# Altium PCB 2002_B_CapteurMeteoWifi.PcbDoc
Units mm, origin at the board's own origin, x right, y up, seen from the top; angles counter-clockwise.
Board outline 88 x 88 mm, 2 copper layers (Top Layer, Bottom Layer), stack 1.586 mm thick; 36 components, 34 nets, 190 pads, 117 vias.
Unrouted connection lines stored in the file: 3.
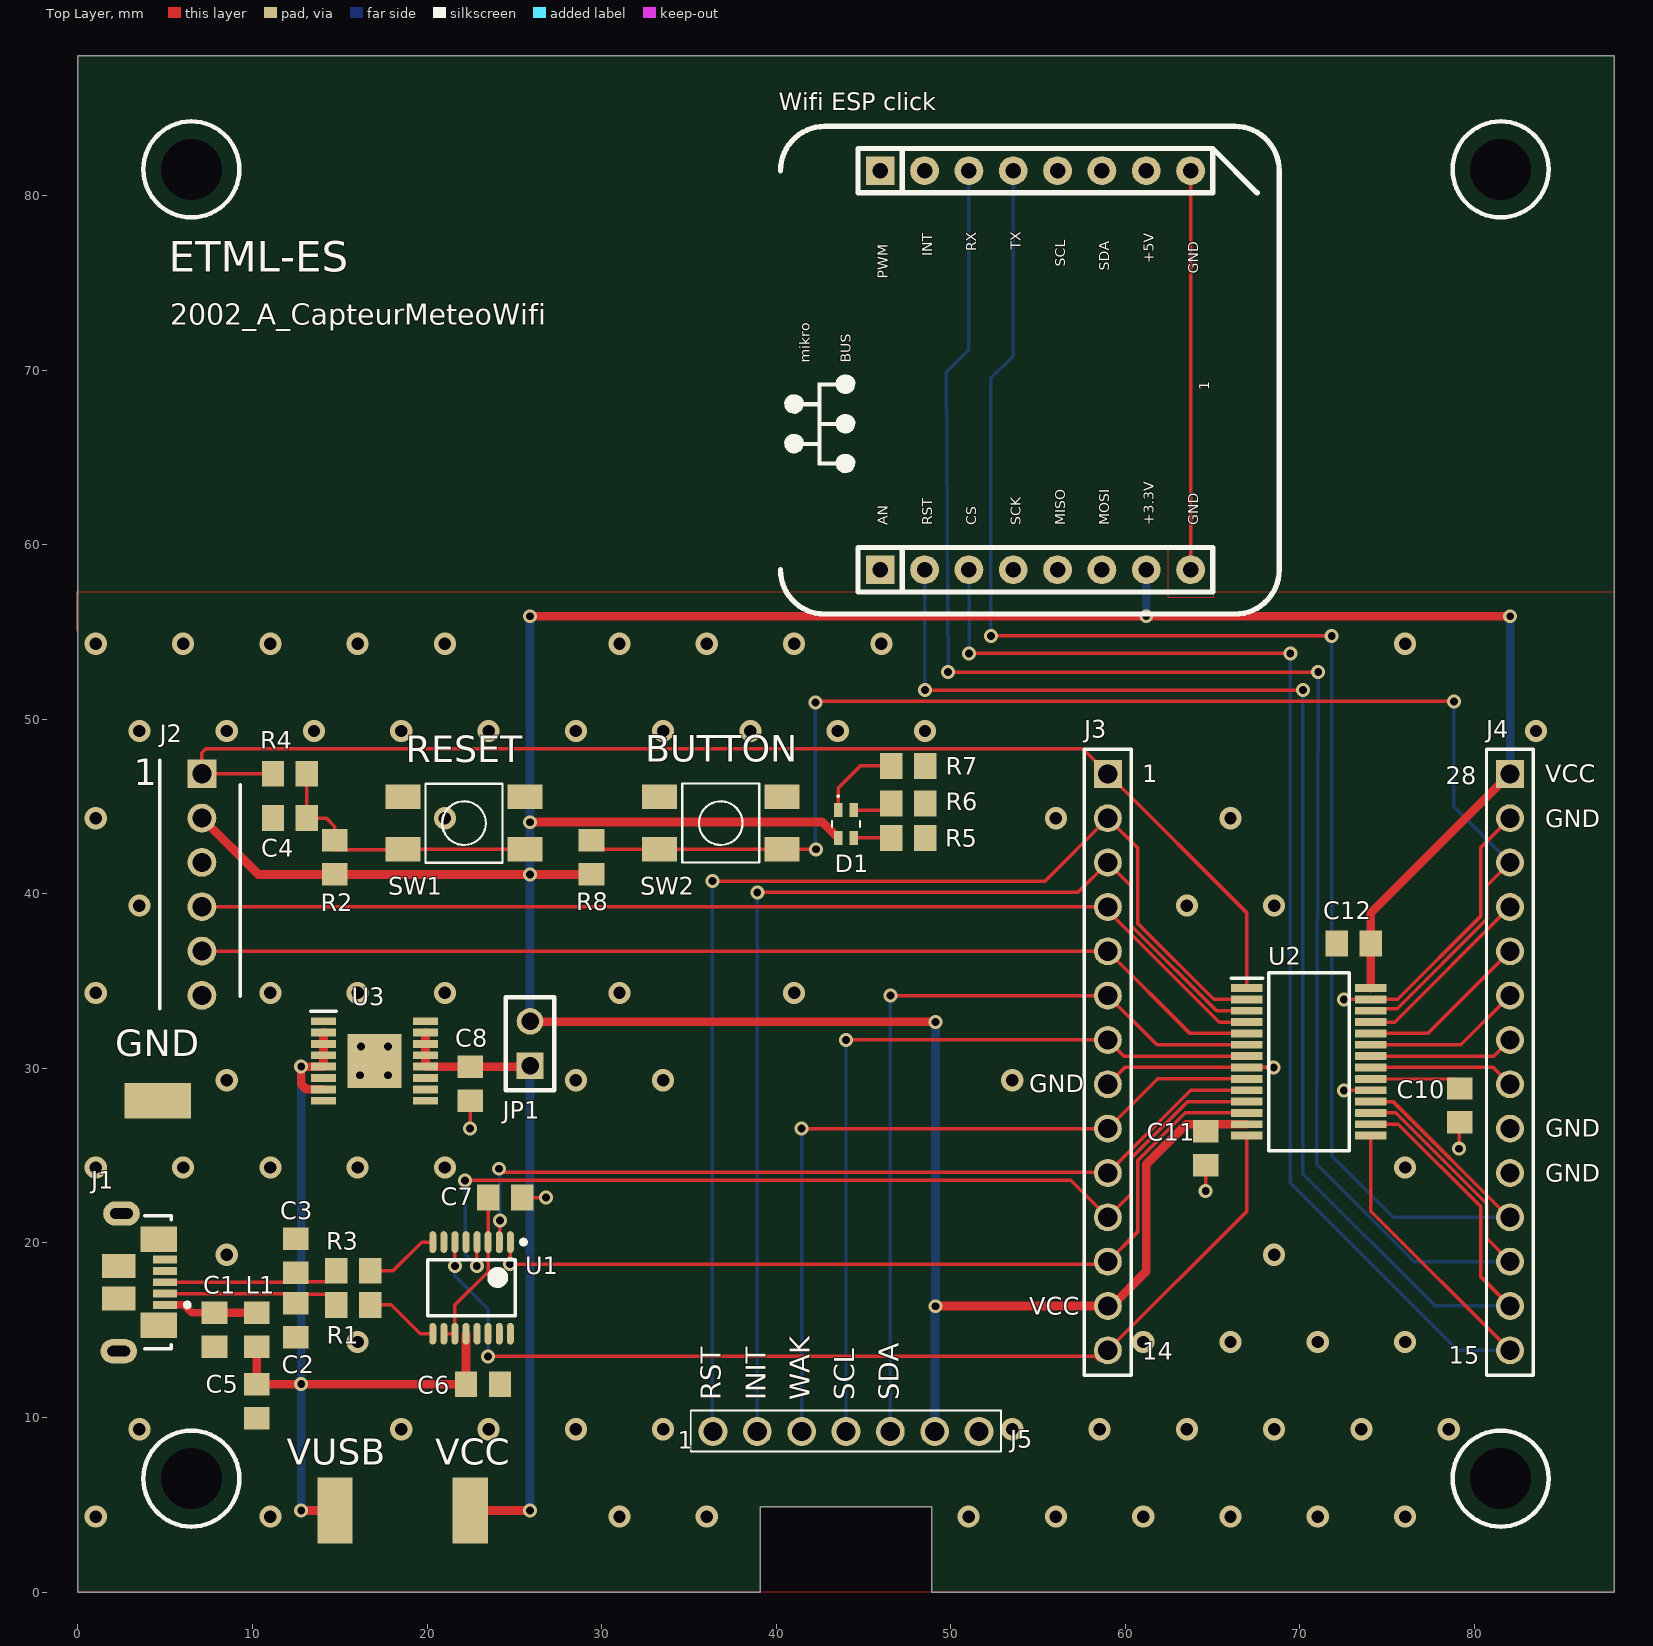
[diagram p0: Top Layer view]
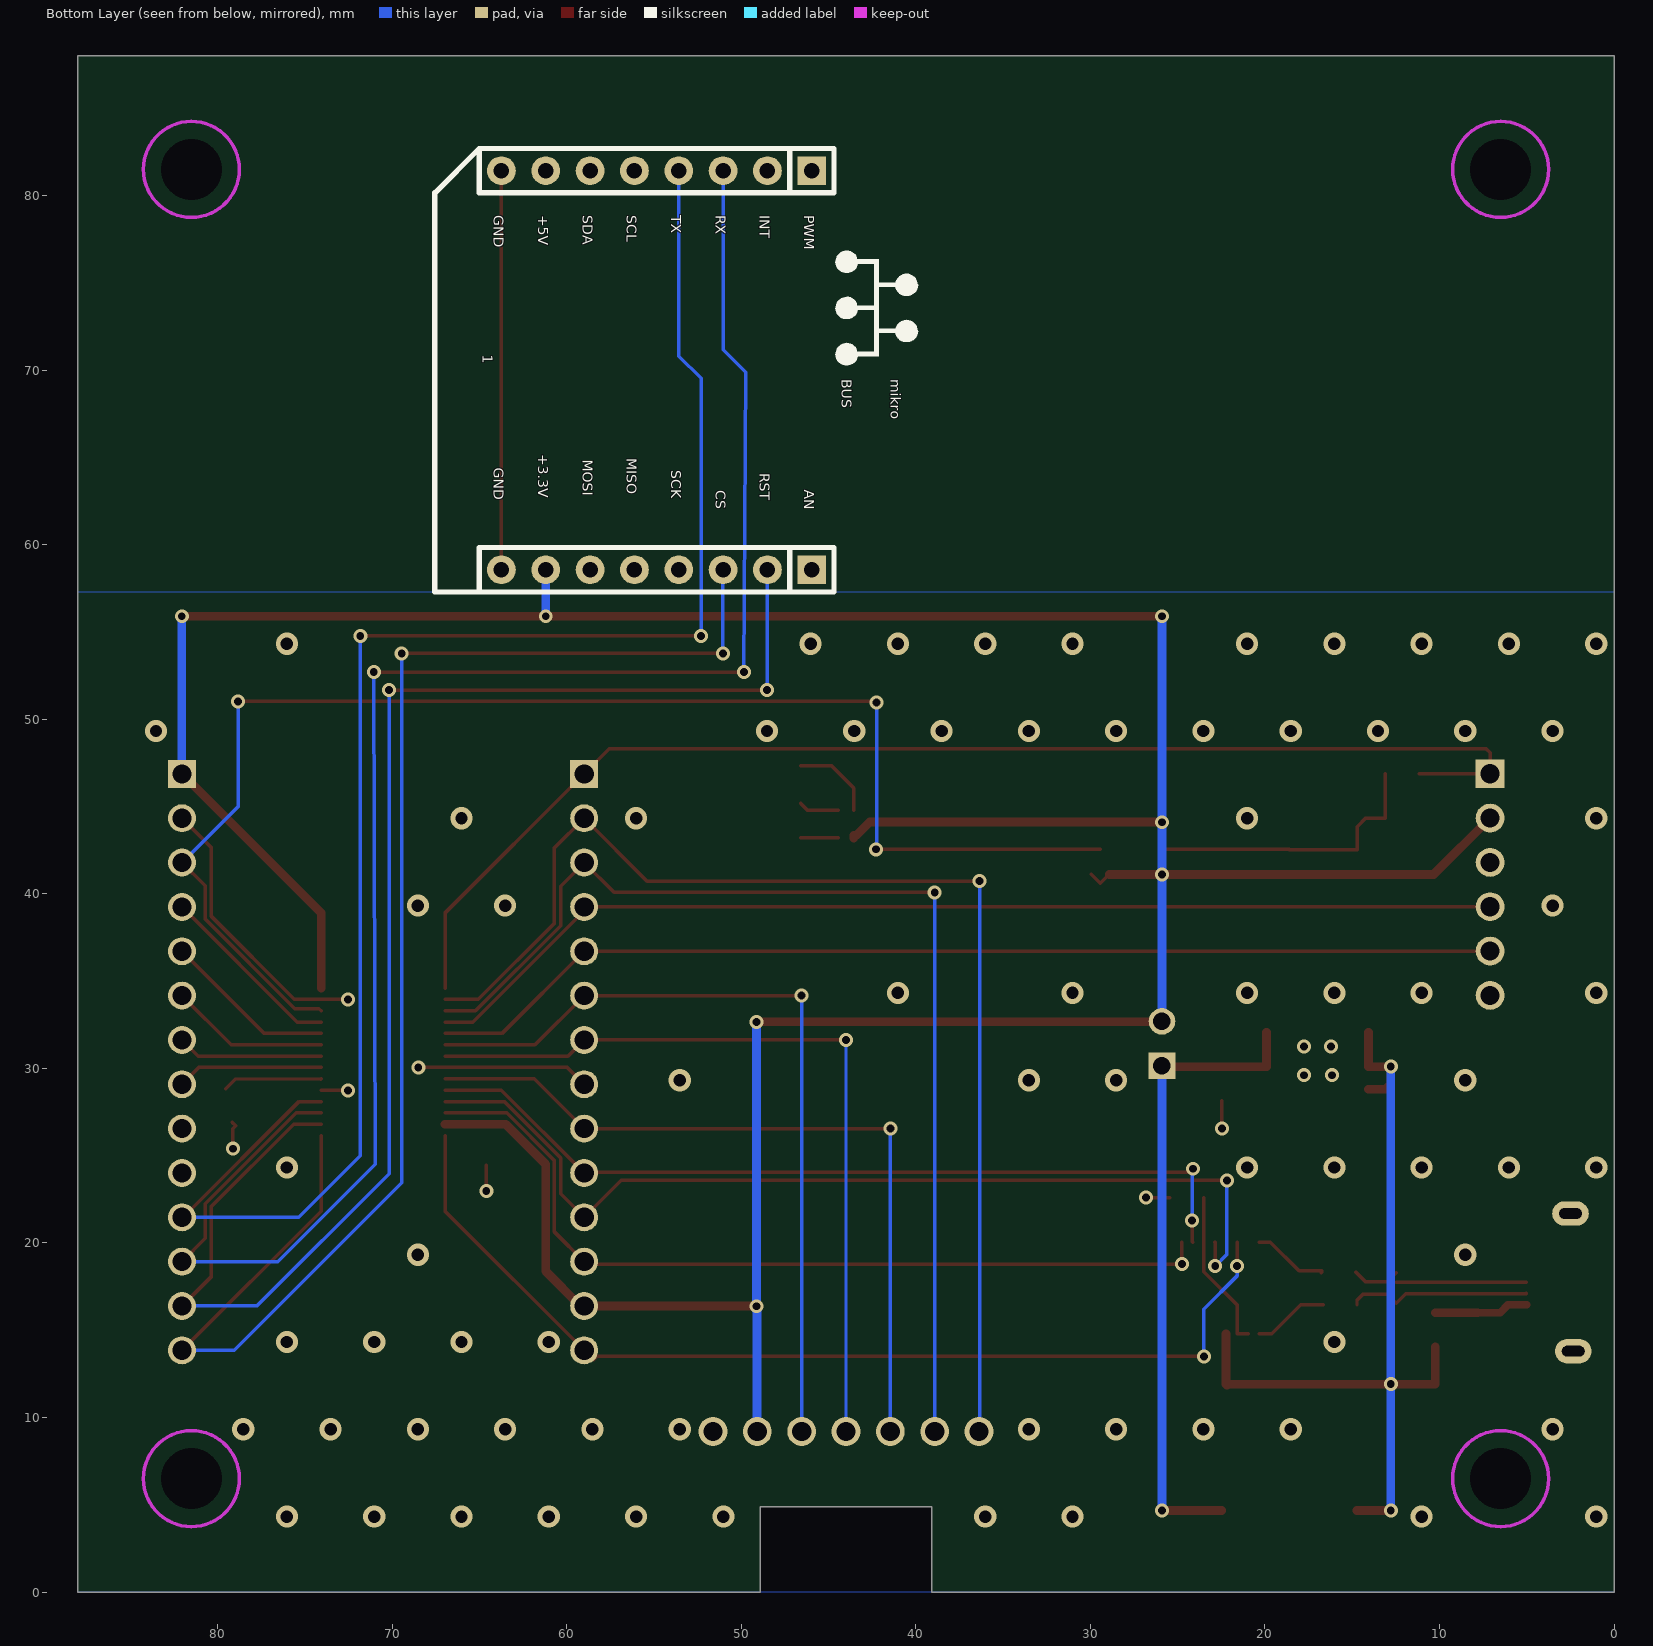
[diagram p1: Bottom Layer view, seen from below]

## Layer stack, top to bottom
Top Solder: solder mask 0.0102, Solder Resist, Dk 3.5
Top Layer: signal copper 0.018
Dielectric1: core 1.55, FR-4, Dk 4.8
Bottom Layer: signal copper 0.018
Bottom Solder: solder mask 0.0102, Solder Resist, Dk 3.5

## Board outline
0,0 0,88 88,88 88,0 48.9,0 48.9,4.9 39.1,4.9 39.1,0

## Design rules (kind name [scope] priority, off if disabled: settings)
BoardOutlineClearance [All] p1: gap=0.25 ignorepadtopadclearanceinfootprint=FALSE except(0: Arc-SplitContinuation Track-SplitContinuation SMDPad-SplitContinuation THPad-SplitContinuation Via-SplitContinuation Fill-SplitContinuation Poly-SplitContinuation Region-SplitContinuation Text-SplitContinuation)
Clearance Clearance-xPP-xTP-xTT [All] p1: gap=0.15 ignorepadtopadclearanceinfootprint=FALSE except(0: Arc-Hole Track-Hole SMDPad-Hole THPad-Hole Via-Hole Fill-Hole Poly-Hole Region-Hole Text-Hole)
ComponentClearance [All] p1: gap=0.25 collisioncheckmode=3 verticalgap=0.25 showdistances=FALSE
DiffPairsRouting [All] p1: maxlimit=0.25 minlimit=0.25 mostfreqgap=0.25 toplayer_minwidth=0.381 toplayer_maxwidth=0.381 toplayer_prefwidth=0.381 bottomlayer_minwidth=0.381 bottomlayer_maxwidth=0.381 bottomlayer_prefwidth=0.381 maxuncoupledlength=12.5
Height [All] p1: minheight=0 maxheight=25 prefheight=12.5
HoleSize HoleSize-PTH [All] p1: absolutevalues=TRUE maxlimit=10 minlimit=0.25 maxpercent=80.000 minpercent=20.000
HoleToHoleClearance [All] p1: gap=0.35 allowstackedmicrovias=TRUE
MinimumAnnularRing "Minimum IAR  >0.45mm" [((ObjectKind = 'Pad') OR (ObjectKind = 'Via')) And (Layer = 'MultiLayer') And (HoleDiameter > AsMM(0.45))] p1: minimumring=0.175 // minimum inner annular ring for pads > 0.45mm finished hole size
MinimumAnnularRing "Minimum IAR <=0.45mm" [((ObjectKind = 'Pad') OR (ObjectKind = 'Via')) And (Layer = 'MultiLayer') And (HoleDiameter <= AsMM(0.45))] p2: minimumring=0.175 // minimum inner annular ring for pads <= 0.45mm finished hole size
MinimumSolderMaskSliver [All] p1: minsoldermaskwidth=0.08
PasteMaskExpansion [All] p1: expansion=-0.025
PlaneClearance PlaneClearance-IPI [All] p1: clearance=0.25
PlaneConnect [All] p1: planeconnectstyle=Relief reliefexpansion=0.175 reliefentries=4 reliefconductorwidth=0.2 reliefairgap=0.2
PolygonConnect PolygonConnect-xTW [All] p1: connectstyle=Relief reliefconductorwidth=0.2 reliefentries=4 polygonreliefangle="90 Angle" airgapwidth=0.2
RoomDefinition 2002_B_CapteurMeteoWifi [InComponentClass('2002_B_CapteurMeteoWifi')] p1: confinementstyle=ConfineIn formatcopy=TRUE lockcomponents=FALSE outline -573.975,-255.675 -523.175,-255.675 -523.175,-230.275 -573.975,-230.275
RoutingCorners [All] p1: cornerstyle=45-Degree minsetback=2.5 maxsetback=2.5
RoutingVias RoutingViasES [All] p1: holewidth=0.3 width=0.65 viastyle="Through Hole" minholewidth=0.25 minwidth=0.61 maxholewidth=0.45 maxwidth=0.8 // finishet hole size <= 0.45mm
SilkToSilkClearance [All] p1: silktosilkclearance=0.2
SilkToSolderMaskClearance SilkscreenOverComponentPads [IsPad] p1: minsilkscreentomaskgap=0.2 clearancetoexposedcopper=TRUE
SolderMaskExpansion [All] p1: expansion=0
UnRoutedNet [All] p1: checkbadconnections=TRUE
Width Width_xSUPPLY [InNetClass('V_SUPPLY')] p1 off: maxlimit=1.5 minlimit=0.3 preferedwidth=0.5
Width Width-xTW [All] p2 off: maxlimit=1.5 minlimit=0.15 preferedwidth=0.2
17 further rules are at their usual default settings.

## Components (designator, comment, footprint, x,y, rotation, side; value= is the part's Value field where it differs from the comment)
C1 "Condensator" LIRD-MI0805K601R-10-2_V 7.825,15.033 r270 top value=10nF
C2 "Condensator" LIRD-MI0805K601R-10-2_V 12.475,15.575 r270 top value=47pF
C3 "Condensator" LIRD-MI0805K601R-10-2_V 12.475,19.275 r90 top value=47pF
C4 "Condensator" LIRD-MI0805K601R-10-2_V 12.148,44.341 r180 top value=100nF
C5 "Condensator" LIRD-MI0805K601R-10-2_V 10.245,10.94 r270 top value=4.7uF
C6 "Condensator" LIRD-MI0805K601R-10-2_V 23.205,11.912 r0 top value=100nF
C7 "Condensator" LIRD-MI0805K601R-10-2_V 24.475,22.602 r0 top value=100nF
C8 "Condensator" LIRD-MI0805K601R-10-2_V 22.469,29.127 r270 top value=4.7uF
C10 "Condensator" LIRD-MI0805K601R-10-2_V 79.15,27.875 r270 top value=10uF
C11 "Condensator" LIRD-MI0805K601R-10-2_V 64.605,25.425 r270 top value=100nF
C12 "Condensator" LIRD-MI0805K601R-10-2_V 73.095,37.154 r180 top value=100nF
D1 "Red & Green & Blue,120°" 150066M153000 44,44 r270 top
GND "5019" TESTPOINT_SMD 4.575,28.15 r0 top
J1 "105164-0001" Molex_105164-0001_0 1.99,17.75 r0 top
J2 "76384-306LF" SHDR6W62P0X254_1X6_1424X460X934P 7.1,46.881 r270 top
J3 "61301411121" 61301411121 59,30.36 r270 top
J4 "61301411121" 61301411121 82.036,30.36 r270 top
J5 "SEN-14348" SEN-14193 36.38,9.2 r0 top
JP1 "Jumper" connector_2PIN 25.9,30.15 r180 top
L1 "MI0805K601R-10" LIRD-MI0805K601R-10-2_V 10.25,15.033 r270 top
R1 "Resistor" LIRD-MI0805K601R-10-2_V 15.775,16.45 r0 top value=27R
R2 "Resistor" LIRD-MI0805K601R-10-2_V 14.72,42.085 r270 top value=10k
R3 "Resistor" LIRD-MI0805K601R-10-2_V 15.775,18.4 r0 top value=27R
R4 "Resistor" LIRD-MI0805K601R-10-2_V 12.148,46.881 r0 top value=1k
R5 "Resistor" LIRD-MI0805K601R-10-2_V 47.573,43.2 r180 top value=68R
R6 "Resistor" LIRD-MI0805K601R-10-2_V 47.573,45.175 r180 top value=5.1R
R7 "Resistor" LIRD-MI0805K601R-10-2_V 47.573,47.325 r180 top value=5.1R
R8 "Resistor" LIRD-MI0805K601R-10-2_V 29.425,42.102 r270 top value=10k
SW1 "430181038816" 430181038816 22.119,44.05 r0 top
SW2 "430181038816" 430181038816 36.825,44.05 r180 top
U1 "FT230XS" FTDI-SSOP-16_L 22.55,17.425 r270 top
U2 "PIC32MX130F256B-I_SS" SOP65P780X200-28N 70.518,30.377 r0 top
U3 "MAX1793EUE33+" SOP65P638X110-17N 16.992,30.425 r0 top
VCC "5019" TESTPOINT_SMD 22.469,4.675 r90 top
VUSB "5019" TESTPOINT_SMD 14.727,4.675 r90 top
"Wifi ESP click" "MIKROBUS HOST CONN." "MIKROBUS HOST CONN." 45.96,58.565 r90 top

## Footprints (in the part's own frame and the unit in brackets; to place one, negate y for a bottom-side part, rotate by r counter-clockwise, add the part's x,y. Pads: shape width x height; smd on the part's side, far side on the other; paste and mask are expansions set on the pad)
150066M153000 [mm]
  rect 0.8x0.5 smd: 1(-0.8,-0.45) 2(-0.8,0.45) 3(0.8,0.45) 4(0.8,-0.45)
  silkscreen extent -1.65,-0.8 0.17,0.8
61301411121 [mm] "Pin Header, pitch 2.54 mm, THT, Vertical, single row, 14p"
  rect 1.6x1.6 hole 1.1: 1(-16.51,0)
  round 1.6 hole 1.1: 2(-13.97,0) 3(-11.43,0) 4(-8.89,0) 5(-6.35,0) 6(-3.81,0) 7(-1.27,0) 8(1.27,0) 9(3.81,0) 10(6.35,0) 11(8.89,0) 12(11.43,0) 13(13.97,0) 14(16.51,0)
  silkscreen extent -17.93,-1.35 17.93,1.35, body extent -17.78,-1.27 17.78,1.27, height 8.57
430181038816 [mm] "4.5*4.5mm vertical type, SMD, height 3.8mm, black actuator, 160gf, T&R"
  rect 2x1.4 smd: 1(-3.5,1.5) 2(3.5,1.5) 3(-3.5,-1.5) 4(3.5,-1.5)
  silkscreen extent -2.2,-2.27 2.2,2.25, body extent -3.75,-2.25 3.75,2.25, height 3.78
connector_2PIN [mil]
  rect 60x60 hole 39.37: 1(0,0)
  round 60 hole 39.37: 2(0,-100)
  silkscreen extent -55,-155 55,55
FTDI-SSOP-16_L [mm] "SOP, 16-Leads, Body 5x4mm, Pitch 0.635mm, IPC High Density"
  oval 1.25x0.4 smd: 1(-2.625,2.222) 2(-2.625,1.587) 3(-2.625,0.952) 4(-2.625,0.317) 5(-2.625,-0.318) 6(-2.625,-0.953) 7(-2.625,-1.588) 8(-2.625,-2.223) 9(2.625,-2.223) 10(2.625,-1.588) 11(2.625,-0.953) 12(2.625,-0.318) 13(2.625,0.317) 14(2.625,0.952) 15(2.625,1.587) 16(2.625,2.222)
  silkscreen extent -2.75,-2.5 1.6,3.1, body extent -2,-2.5 2,2.5, height 1.76
LIRD-MI0805K601R-10-2_V [mm] "Chip Bead, 2-Leads, Body 2.2 x1.45 mm"
  rect 1.285x1.47 smd: 1(-0.973,0) 2(0.973,0)
  body extent -1.1,-0.72 1.1,0.73, height 1.1
"MIKROBUS HOST CONN." [mil]
  rect 65x65 hole 35: 1(0,0) 16(900,0)
  round 65 hole 35: 2(0,-100) 3(0,-200) 4(0,-300) 5(0,-400) 6(0,-500) 7(0,-600) 8(0,-700) 9(900,-700) 10(900,-600) 11(900,-500) 12(900,-400) 13(900,-300) 14(900,-200) 15(900,-100)
  silkscreen extent -100,-900 1000,225, body extent -49,-755 949,55, height 335
Molex_105164-0001_0 [mm]
  rect 1.38x0.45 smd paste+0 mask+0: 1(3.01,-1.3) 2(3.01,-0.65) 3(3.01,0) 4(3.01,0.65) 5(3.01,1.3)
  rect 2.1x1.475 smd paste+0 mask+0: 7(2.65,2.462) 10(2.65,-2.462)
  rect 1.9x1.375 smd paste+0 mask+0: 8(0.35,0.937) 9(0.35,-0.937)
  oval 2.1x1.4 hole 0.6 slot 1.3 at 0 deg paste-1000 mask+0: 11(0.35,-3.95) 11(0.508,3.937)
  silkscreen extent 1.85,-3.8 4.4,3.8, body extent -1.79,-4.09 3.36,4.11, height 2.48
SEN-14193 [mm]
  round 1.65 hole 1.1: 1(0,0) 2(2.54,0) 3(5.08,0) 4(7.62,0) 5(10.16,0) 6(12.7,0) 7(15.24,0)
  silkscreen extent -1.27,-1.15 16.5,1.2, body extent -5.1,-1.1 20.3,24.2, height 7.55
SHDR6W62P0X254_1X6_1424X460X934P [mm]
  rect 1.65x1.65 hole 1.1: 1(0,0)
  round 1.65 hole 1.1: 2(2.54,0) 3(5.08,0) 4(7.62,0) 5(10.16,0) 6(12.7,0)
  silkscreen extent -0.77,-2.4 13.47,2.2, body extent -0.77,-2.3 13.47,2.3, height 9.34
SOP65P638X110-17N [mm]
  rect 1.45x0.45 smd: 1(-2.925,2.275) 2(-2.925,1.625) 3(-2.925,0.975) 4(-2.925,0.325) 5(-2.925,-0.325) 6(-2.925,-0.975) 7(-2.925,-1.625) 8(-2.925,-2.275) 9(2.925,-2.275) 10(2.925,-1.625) 11(2.925,-0.975) 12(2.925,-0.325) 13(2.925,0.325) 14(2.925,0.975) 15(2.925,1.625) 16(2.925,2.275)
  rect 3.1x3.1 smd: 17(0,0)
  silkscreen extent -3.65,2.85 -2.2,2.85, body extent -3.19,-2.5 3.19,2.5, height 1.1
SOP65P780X200-28N [mm]
  rect 1.8x0.45 smd: 1(-3.55,4.225) 2(-3.55,3.575) 3(-3.55,2.925) 4(-3.55,2.275) 5(-3.55,1.625) 6(-3.55,0.975) 7(-3.55,0.325) 8(-3.55,-0.325) 9(-3.55,-0.975) 10(-3.55,-1.625) 11(-3.55,-2.275) 12(-3.55,-2.925) 13(-3.55,-3.575) 14(-3.55,-4.225) 15(3.55,-4.225) 16(3.55,-3.575) 17(3.55,-2.925) 18(3.55,-2.275) 19(3.55,-1.625) 20(3.55,-0.975) 21(3.55,-0.325) 22(3.55,0.325) 23(3.55,0.975) 24(3.55,1.625) 25(3.55,2.275) 26(3.55,2.925) 27(3.55,3.575) 28(3.55,4.225)
  silkscreen extent -4.45,-5.1 2.3,5.1, body extent -3.9,-5.1 3.9,5.1, height 2
TESTPOINT_SMD [mm]
  rect 3.8x2.03 smd: 1(0,0)
  body extent -1.91,-1.02 1.91,1.01, height 2.29

## Part data
C1 C2 C3 C4 C5 C6 C7 C8 C10 C11 C12: "0805 Condensator"
D1: library part APHF1608LSEEQBDZGKC, "DEL standard - CMS RGB 0603 SMD", Emitting Color="Red & Green & Blue", Forward Voltage="3.3 V@Blue, 3.3 V@Green, 2 V@Red", Operating Temperature="-40 to 85 degC", Part Number=150066M153000, ComponentLink1Description=Manufacturer, ComponentLink1URL=http://www.we-online.de, ComponentLink2Description=Datasheet, ComponentLink2URL=http://katalog.we-online.de/led/datasheet/150066M153000.pdf, Dominant Wavelength="470 nm@Blue, 525 nm@Green, 624 nm@Red", Luminous Intensity="180 mcd@Blue, 900 mcd@Green, 285 mcd@Red", Mounting Technology=SMT, Peak Wavelength="468 nm@Blue, 520 nm@Green, 632 nm@Red", Published Date="May 2018", Publisher="Wurth Elektronik", Size=0606, Viewing Angle=120°
GND VCC VUSB: library part TESTPOINT, "Test point smd"
J1: "Connecteurs USB MICRO USB B RECEPT TOP MOUNT", Supplier Part Number 1=538-105164-0001, Supplier 1=Mouser
J2: "Connector", Manufacturer_Name=Amphenol, Datasheet Link=https://www.mouser.co.uk/datasheet/2/18/76384-1363448.pdf, Height=9.34mm, Manufacturer_Part_Number=76384-306LF
J3 J4: "WR-PHD Pin Header, THT, pitch 2.54mm, Single Row, Vertical, 14pin", Contact Resistance=20mOhm, Operating Temperature="-40 to +105degC", Rated Current=3A, Withstanding Voltage=500VAC, Working Voltage=250VAC, ComponentLink1Description=Manufacturer, ComponentLink1URL=http://www.we-online.de, ComponentLink2Description=Datasheet, ComponentLink2URL=https://katalog.we-online.de/em/datasheet/6130xx11121.pdf, Gender=Male, Mounting Technology=THT, Orientation=Vertical, Packaging=Bag, Part Number=61301411121, Pin Number=14, Pitch=2.54mm, Published Date="June 2019", Publisher="Wurth Elektronik", Row Number=Single
J5: library part SEN-14193, "CCS811 kit", Manufacturer_Name=Amphenol, Manufacturer_Part_Number=68604-804HLF, Mouser2 Part Number=649-68604-804HLF, Datasheet Link=https://componentsearchengine.com/Datasheets/1/68604-804HLF.pdf, Height=12.39mm, Mouser2 Price/Stock=https://www.mouser.com/Search/Refine.aspx?Keyword=649-68604-804HLF
L1: library part CMP-2000-05196-1, "Chip Bead for Power Filtering, 1500 mA, 600 Ohm, -40 to 125 degC, 0805 (2012 Metric), RoHS, Tape and Reel", Current Rating (Max)=1.5A, DC Resistance (DCR) (Max)=100mOhm, Impedance @ Frequency=600Ohm@100MHz, Manufacturer=Laird, Operating Temperature=-40degC~125degC, Package / Case=0805(2012Metric), Package Description="2-Pin Surface Mount Device, Body 2 x 1.25 mm", Package Reference=MI0805K601R-10-2, Ratings=-, Standard Package=1, Catalog Drawings=(HI,HZ,LI,MI)0805Series_1.10mmMax.Height, Category=Filters, Datasheet URL=https://datasheet.ciiva.com/3082/mi0805k601r-10-a-vp-3082219.pdf, Datasheet Version="Rev. A, 01/2004", Family=FerriteBeadsandChips, Filter Type=PowerLine, Height (Max)="0.043\"(1.10mm)", Kits=240-2227-ND-KITEMIFERRITEBEADCHIPSMD, Manufacturer URL=https://www.lairdtech.com, Mounting Type=SurfaceMount, Number of Lines=1, Online Catalog=MISeries, Other Names=240-2390-1, Packaging=CutTape(CT), Series=MI, Size / Dimension="0.079\"Lx0.049\"W(2.00mmx1.25mm)", Supplier=Digikey, Supplier min. qty=1, Supplier Ref.=240-2390-1-ND, Supplier unit price=0.11
R1 R2 R3 R4 R5 R6 R7 R8: "0805 Resistor"
SW1 SW2: "WS-TASV SMD Tact Switch 4.5X4.5 mm", Manufacturer="Wuerth Elektronik", ComponentLink1Description="Manufacturer URL", ComponentLink1URL=http://www.we-online.com, ComponentLink2Description=Datasheet, ComponentLink2URL=http://katalog.we-online.de/em/datasheet/430181038816.pdf, NoPins=04, PackageReference=430181038816, PartNumber=430181038816
U1: library part CMP-2000-06288-1, "USB to Basic UART IC, 2.97 to 5.5 V, -40 to 85 degC, 16-Pin SSOP, RoHS", Interface Case Style=SSOP, Manufacturer=FTDI, Operating Temperature Max=85°C, Operating Temperature Min=-40°C, Package Description="16-Pin Shrink Small Outline Package Integrated Circuit, Body 4.9 x 3.9 mm, Pitch 0.635 mm", Package Reference=SSOP-16, Supply Voltage Max=5.5V, Supply Voltage Min=2.97V, Data Rate=3Mbaud, Datasheet URL=http://www.ftdichip.com/Support/Documents/DataSheets/ICs/DS_FT230X.pdf, Datasheet Version="Rev. 1.4, 05/2016", Manufacturer URL=http://www.ftdichip.com/, Mounting Technology=SurfaceMount, MSL=MSL3-168hours, No. of Pins=16Pins, No. of Ports=-, Packaging=CutTape, Product Range=-, Supplier=Digikey, Supplier min. qty=1, Supplier Ref.=768-1135-1-ND, Supplier unit price=2.00, SVHC=NoSVHC(17-Dec-2015), USB Standard=USB2.0, USB Type=Transceiver
U2: "Integrated Circuit", Manufacturer_Name=Microchip, Manufacturer_Part_Number=PIC32MX130F256B-I/SS, Mouser Part Number=579-MX130F256BISS, RS Part Number=8806720P, Datasheet Link=https://componentsearchengine.com/Datasheets/1/PIC32MX130F256B-I_SS.pdf, Height=2mm, Mouser Price/Stock=https://www.mouser.com/Search/Refine.aspx?Keyword=579-MX130F256BISS, RS Price/Stock=http://uk.rs-online.com/web/p/products/8806720P
U3: "Integrated Circuit", Manufacturer_Name="Maxim Integrated", Supplier Part Number 1=700-MAX1793EUE33, Datasheet Link=http://datasheets.maximintegrated.com/en/ds/MAX1793.pdf, Height=1.1mm, Manufacturer_Part_Number=MAX1793EUE33+, Supplier 1=Mouser
"Wifi ESP click": library part "MIKROBUS HOST CONN._1", "mikroBUS Host Socket", SMD=No

## Free pads (board coordinates)
  round 0 hole 3.5: 8(6.5,6.5) 8(6.5,81.5) 8(81.5,6.5) 8(81.5,81.5)

## Via types
v1: diameter 1.27, hole 0.711, Top Layer to Bottom Layer, tented both sides, 72 vias
v2: diameter 0.8, hole 0.45, Top Layer to Bottom Layer, tented both sides, 45 vias

## Nets (pads, with @x,y where several pads share a name; then routed paths per layer and width w, separated by ;. In a path a pad name is that pad's centre, name@x,y a point inside that pad or via, vN(x,y) a via of type N, cw(c..) or ccw(c..) an arc to the next point about the centre after c; other vN are vias at no path point)
BUTTON: J4.3 R8.1 SW2.1 SW2.2 U2.26 | length 81
  Top Layer w0.2: R8.1@29.425,42.55 SW2.2 SW2.1 v2(42.275,42.55) ; v2(42.25,50.95) 42.325,51.025 v2(78.825,51.025) ; U2.26 74.193,33.427 75.569,33.427 80.7,38.558 80.7,40.454 J4.3
  Bottom Layer w0.2: v2(42.25,50.95) 42.25,42.575 v2(42.275,42.55) ; v2(78.825,51.025) 78.825,45.001 J4.3
GND: "Wifi ESP click.8" "Wifi ESP click.9" C1.2 C2.2 C3.2 C4.2 C5.2 C6.2 C7.2 C8.2 C10.2 C11.2 C12.2 GND.1 J1.5 J1.7 J1.8 J1.9 J1.10 J1.11 J2.3 J3.8 J4.2 J4.9 J4.10 J5.7 SW1.1 SW1.2 SW2.3 SW2.4 U1.13 U2.8 U2.19 U2.27 U3.10 U3.11 U3.17 | length 56.5
  Top Layer w0.2: v2(22.469,26.549) C8.2 ; C7.2 v2(26.805,22.602) ; J3.8 59.962,30.052 U2.8 v2(68.5,30.052) ; 63.74,58.565 63.74,81.425 ; v2(64.605,22.97) C11.2 ; v2(72.525,28.725) 72.538,28.738 74.055,28.738 U2.19 ; v2(72.525,33.952) U2.27 75.599,33.952 80.35,38.703 80.35,42.644 J4.2 ; v2(79.125,25.4) 79.125,26.55 78.961,26.714 C10.2
  other v1: 1.025,4.325 11.025,4.325 31.025,4.325 36.025,4.325 51.025,4.325 56.025,4.325 61.025,4.325 66.025,4.325 71.025,4.325 76.025,4.325 3.525,9.325 18.525,9.325 23.525,9.325 28.525,9.325 33.525,9.325 53.525,9.325 58.525,9.325 63.525,9.325 68.525,9.325 73.525,9.325 78.525,9.325 16.025,14.325 61.025,14.325 66.025,14.325 71.025,14.325 76.025,14.325 8.525,19.325 68.525,19.325 1.025,24.325 6.025,24.325 11.025,24.325 16.025,24.325 21.025,24.325 76.025,24.325 8.525,29.325 28.525,29.325 33.525,29.325 53.525,29.325 1.025,34.325 11.025,34.325 16.025,34.325 21.025,34.325 31.025,34.325 41.025,34.325 3.525,39.325 63.525,39.325 68.525,39.325 1.025,44.325 21.025,44.325 56.025,44.325 66.025,44.325 3.525,49.325 8.525,49.325 13.525,49.325 18.525,49.325 23.525,49.325 28.525,49.325 33.525,49.325 38.525,49.325 43.525,49.325 48.525,49.325 83.525,49.325 1.025,54.325 6.025,54.325 11.025,54.325 16.025,54.325 21.025,54.325 31.025,54.325 36.025,54.325 41.025,54.325 46.025,54.325 76.025,54.325
  other v2: 16.156,29.609 17.767,29.609 16.212,31.25 17.767,31.25
LED_B: J4.7 R7.1 U2.22 | length 8.4
  Top Layer w0.2: U2.22 81.108,30.702 J4.7
LED_G: J4.5 R6.1 U2.24 | length 9.9
  Top Layer w0.2: U2.24 77.328,32.002 J4.5
LED_R: J4.4 R5.1 U2.25 | length 10.7
  Top Layer w0.2: U2.25 75.438,32.652 J4.4
M\C\L\R\: J2.1 J3.1 R4.1 U2.1 | length 73.4
  Top Layer w0.2: R4.1 J2.1 7.1,48.075 7.335,48.31 57.56,48.31 J3.1 66.968,38.902 U2.1
NetC2_1: C2.1 J1.2 R1.1 | length 10.6
  Top Layer w0.2: J1.2@5.021,17.107 5.038,17.09 11.933,17.09 C2.1 13.002,17.075 14.375,17.075 14.727,16.723 R1.1@14.727,16.458
NetC3_1: C3.1 J1.3 R3.1 | length 10.2
  Top Layer w0.2: J1.3@5.021,17.758 C3.1@12.475,17.758 ; C3.1 13.002,17.775 14.242,17.775 R3.1@14.802,18.335
NetC4_1: C4.1 R2.1 R4.2 SW1.3 SW1.4 | length 16.6
  Top Layer w0.2: R4.2 C4.1 14.228,44.341 14.72,43.85 14.72,42.532 18.602,42.532 SW1.3 SW1.4 SW1.4@25.626,42.544
NetC7_1: C7.1 U1.3 U1.10 U1.11 | length 9.2
  Top Layer w0.2: U1.10 U1.11 21.597,16.447 23.502,18.352 U1.3 C7.1
NetC10_1: C10.1 U2.20 | length 5.7
  Top Layer w0.2: U2.20 U2.20@74.103,29.367 ; U2.20@74.097,29.393 C10.1@78.982,29.393 ; C10.1@78.988,29.367 C10.1@79.53,28.825
NetR1_2: R1.2 U1.9 | length 4.3
  Top Layer w0.2: R1.2@16.673,16.458 17.95,16.458 19.608,14.8 U1.9
NetR3_2: R3.2 U1.8 | length 4.3
  Top Layer w0.2: R3.2@16.748,18.335 R3.2@16.78,18.302 ; R3.2 16.78,18.4 18.048,18.4 19.698,20.05 U1.8
PGEC: J2.5 J3.5 U2.5 | length 61
  Top Layer w0.2: J2.5 7.106,36.716 58.199,36.716 J3.5@58.205,36.71 ; J3.5 63.708,32.002 U2.5
PGED: J2.4 J3.4 U2.4 | length 61.9
  Top Layer w0.2: J2.4 7.106,39.256 58.199,39.256 J3.4@58.205,39.25 ; J3.4 59,39.033 65.381,32.652 U2.4
RB10: J4.8 U2.21 | length 8.4
  Top Layer w0.2: U2.21 81.074,30.052 J4.8
RB12: J4.6 U2.23 | length 9.1
  Top Layer w0.2: U2.23 79.218,31.352 J4.6
SENS_I\N\T\: J3.3 J5.2 U2.3 | length 64.5
  Top Layer w0.2: v2(38.92,40.08) 57.29,40.08 J3.3 60.35,40.44 60.35,38.178 65.226,33.302 U2.3
  Bottom Layer w0.2: J5.2 38.92,39.698 v2(38.92,40.08)
SENS_R\S\T\: J3.2 J5.1 U2.2 | length 70.5
  Top Layer w0.2: v2@36.35,40.73 55.4,40.73 J3.2 60.7,42.63 60.7,38.323 65.071,33.952 U2.2
  Bottom Layer w0.2: v2(36.35,40.73) 36.35,9.23 J5.1
SENS_SCL: J3.7 J5.4 U2.7 | length 45.8
  Top Layer w0.2: v2(44,31.625) 44.005,31.63 J3.7 59.928,30.702 U2.7
  Bottom Layer w0.2: J5.4 v2(44,31.625)
SENS_SDA: J3.6 J5.5 U2.6 | length 46.6
  Top Layer w0.2: v2(46.55,34.175) 46.553,34.172 58.997,34.172 J3.6 61.818,31.352 U2.6
  Bottom Layer w0.2: J5.5 v2@46.54,34.175
SENS_W\A\K\: J3.9 J5.3 U2.9 | length 44.1
  Top Layer w0.2: v2(41.448,26.548) 41.449,26.549 58.999,26.549 J3.9 61.852,29.402 U2.9
  Bottom Layer w0.2: J5.3 v2@41.46,26.548
USB_CTS: J3.14 U1.6 U2.14 | length 58.8
  Top Layer w0.2: U1.6 21.597,18.677 v2(21.6,18.67) ; v2(23.5,13.5) 58.25,13.5 58.45,13.3 J3.14 66.968,21.818 U2.14
  Bottom Layer w0.2: v2(21.6,18.67) 21.6,18.107 23.5,16.207 v2(23.5,13.5)
USB_RTS: J3.10 U1.2 U2.10 | length 49.1
  Top Layer w0.2: v2(24.126,24.251) 24.335,24.042 58.967,24.042 J3.10 63.742,28.752 U2.10 ; U1.2 24.158,20.07 24.158,21.264 v2(24.178,21.285)
  Bottom Layer w0.2: v2(24.126,24.251) 24.152,24.226 24.152,21.31 v2(24.178,21.285)
USB_RX: J3.11 U1.4 U2.11 | length 56.2
  Top Layer w0.2: v2(22.175,23.587) 56.872,23.587 58.995,21.465 J3.11 60.35,22.82 60.35,24.865 63.587,28.102 U2.11 ; v2(22.85,18.675) 22.85,20.032 U1.4
  Bottom Layer w0.2: v2(22.175,23.587) 22.175,19.35 v2(22.85,18.675)
USB_TX: J3.12 U1.1 U2.12 | length 49.4
  Top Layer w0.2: U1.1 24.762,20.039 v2(24.762,18.801) 24.771,18.791 58.861,18.791 J3.12 60.7,20.63 60.7,24.72 63.432,27.452 U2.12
VBUS: C1.1 J1.1 L1.1 | length 5.4
  Top Layer w0.45: J1.1@5.021,16.458 6.073,16.458 6.525,16.005 C1.1
  Top Layer w0.5: C1.1 L1.1
VCC: "Wifi ESP click.7" C11.1 C12.1 J2.2 J3.13 J4.1 J5.6 JP1.2 R2.2 R8.2 U2.13 U2.28 | length 221.9
  Top Layer w0.2: JP1.2 JP1.2@25.919,32.671 ; R8.2@28.918,41.112 29.425,40.605 R8.2@29.943,41.123 ; v2@49.106,32.671 v2(49.125,32.652) ; v2(49.125,16.375) v2@49.14,16.39 ; J3.13 J3.13@59.215,16.39
  Top Layer w0.5: J2.2 10.329,41.112 R2.2 v2(25.9,41.112) R8.2@28.918,41.112 ; v2(25.9,44.1) 25.917,44.118 42.633,44.118 43.4,43.35 43.55,43.35 43.55,43.2 ; v2(25.9,55.9) v2(61.2,55.9) v2(82.05,55.9) ; JP1.2@25.919,32.671 v2@49.106,32.671 ; v2@49.14,16.39 J3.13 ; J3.13@59.215,16.39 61.2,18.375 61.2,24.513 63.489,26.802 U2.13 ; U2.28 C12.1 74.068,38.902 J4.1
  Bottom Layer w0.2: J5.6 J5.6@49.103,9.222 ; v2@49.103,16.352 v2(49.125,16.375)
  Bottom Layer w0.5: JP1.2 v2(25.9,41.112) v2(25.9,44.1) v2(25.9,55.9) ; J5.6@49.103,9.222 v2@49.103,16.352 ; v2(49.125,16.375) v2(49.125,32.652) ; v2(61.2,55.9) 61.2,58.565 ; J4.1 81.936,46.97 82.05,47.084 v2(82.05,55.9)
VCCREG: C8.1 JP1.1 U3.12 U3.13 U3.14 U3.15 VCC.1 | length 36.8
  Top Layer w0.5: U3.15 U3.14 U3.13 U3.12 C8.1 JP1.1@25.9,30.1 ; VCC.1 v2(25.9,4.675)
  Bottom Layer w0.5: v2(25.9,4.675) JP1.1
VUSB: C5.1 C6.1 L1.2 U1.12 U3.2 U3.3 U3.4 U3.5 U3.7 VUSB.1 | length 50.1
  Top Layer w0.5: L1.2 10.248,14.058 10.248,11.915 C5.1 v2(12.791,11.912) C6.1 ; v2(12.791,4.675) VUSB.1 ; U3.7 13.084,28.8 12.791,29.093 v2(12.791,30.1) U3.5 U3.4 U3.3 U3.2 ; C6.1@22.175,11.855 C6.1 ; U1.12 C6.1
  Bottom Layer w0.5: v2(12.791,4.675) v2(12.791,11.912) v2(12.791,30.1)
WIFI_EN: "Wifi ESP click.3" J4.14 U2.15 | length 85.7
  Top Layer w0.2: v2(51.05,53.775) v2(69.45,53.775) ; U2.15 74.068,21.818 J4.14
  Bottom Layer w0.2: 51.04,58.565 51.05,58.555 v2(51.05,53.775) ; v2(69.45,53.775) 69.45,23.45 79.05,13.85 J4.14
WIFI_RST: "Wifi ESP click.2" J4.13 U2.16 | length 85.9
  Top Layer w0.2: v2(48.525,51.675) v2(70.175,51.675) ; U2.16 75.644,26.802 80.35,22.096 80.35,18.076 J4.13
  Bottom Layer w0.2: 48.5,58.565 48.5,51.7 v2(48.525,51.675) ; v2(70.175,51.675) 70.175,23.975 77.76,16.39 J4.13
WIFI_RX: "Wifi ESP click.13" J4.11 U2.18 | length 98.9
  Top Layer w0.2: v2(52.3,54.775) v2(71.825,54.775) ; U2.18 75.334,28.102 81.966,21.47 J4.11
  Bottom Layer w0.2: v2(52.3,54.775) 52.3,69.525 53.58,70.805 53.58,81.425 ; v2(71.825,54.775) 71.825,25 75.355,21.47 J4.11
WIFI_TX: "Wifi ESP click.14" J4.12 U2.17 | length 104.7
  Top Layer w0.2: v2(49.85,52.7) v2(71.05,52.7) ; U2.17 75.489,27.452 80.7,22.241 80.7,20.266 J4.12
  Bottom Layer w0.2: v2(49.85,52.7) 49.751,69.876 51.04,71.165 51.04,81.425 ; v2(71.05,52.7) 70.977,24.498 76.545,18.93 J4.12
pads on no net: "Wifi ESP click.1" "Wifi ESP click.4" "Wifi ESP click.5" "Wifi ESP click.6" "Wifi ESP click.10" "Wifi ESP click.11" "Wifi ESP click.12" "Wifi ESP click.15" "Wifi ESP click.16" D1.1 D1.2 D1.3 D1.4 J1.4 J2.6 R5.2 R6.2 R7.2 U1.5 U1.7 U1.14 U1.15 U1.16 U3.1 U3.6 U3.8 U3.9 U3.16
copper on no net: | length 9.3
  Top Layer w0.2: 43.55,44.8 43.55,46.06 44.815,47.325 46.6,47.325 ; 44.45,43.2 46.6,43.2 ; 44.45,44.8 46.225,44.8 46.6,45.175

## Polygon pours and split planes (outlines as drawn)
GND on Top Layer "Top Layer-GND 1" (solid, shelved, pour order 20): 62.425,59.826 62.425,57 65.071,57 65.071,59.802
GND on Top Layer "Top Layer-GND" (solid, remove dead copper, shelved, pour order 12): 0,55 -0.075,55.075 -0.075,57.3 88,57.3 88,55 88,0 0,0
no net on Top Layer "Top Layer-No Net" (solid, pour order 10): -3.15,54
no net on Top Layer "Top Layer-No Net 1" (solid, pour order 6): 129.675,60
GND on Bottom Layer "Bottom Layer-GND" (solid, remove dead copper, shelved, pour order 18): 0,0 88,0 88,57.3 0,57.3

## Keep-outs
Top Layer:
  circle w0.2: c6.5,81.5 r2.75
  circle w0.2: c81.5,81.5 r2.75
  circle w0.2: c81.5,6.5 r2.75
  circle w0.2: c6.5,6.5 r2.75
Bottom Layer:
  circle w0.2: c6.5,81.5 r2.75
  circle w0.2: c81.5,81.5 r2.75
  circle w0.2: c81.5,6.5 r2.75
  circle w0.2: c6.5,6.5 r2.75

## Silkscreen, mask and mechanical layers (free items; w line width, h text height)
Top Overlay:
  circle w0.254: c6.5,81.5 r2.75
  circle w0.254: c81.5,81.5 r2.75
  circle w0.254: c81.5,6.5 r2.75
  circle w0.254: c6.5,6.5 r2.75
  text "ETML-ES" at 5.2,75.075 h3
  text "2002_A_CapteurMeteoWifi" at 5.3,72.6 h1.2
  text "BUTTON" at 32.5,47.575 h1.52
  text "RESET" at 18.775,47.55 h1.52
  text "VCC" at 84.05,46.4 h1
  text "1" at 3.2,46.225 h1.52
  text "GND" at 84.05,43.825 h1
  text "GND" at 54.5,28.625 h1
  text "GND" at 84.05,26.075 h1
  text "GND" at 84.05,23.5 h1
  text "VCC" at 54.5,15.9 h1
  text "RST" at 36.825,11 h1.15 r90
  text "INIT" at 39.395,11 h1.15 r90
  text "WAK" at 41.935,11 h1.15 r90
  text "SCL" at 44.475,11 h1.15 r90
  text "SDA" at 47.015,11 h1.15 r90
  text "1" at 34.35,8.217 h1
Board Outline (ES):
  the board outline again, w0.254

## Text inside footprints (layer, text, board x,y; h text height)
J3: Top Overlay "1" at 60.975,46.385 h1; Top Overlay "14" at 60.975,13.31 h1
J4: Top Overlay "28" at 78.35,46.28 h1; Top Overlay "15" at 78.525,13.075 h1
"Wifi ESP click": Top Overlay "1" at 65.01,68.852 h1 r90; Top Overlay "BUS" at 44.474,70.427 h1 r90; Top Overlay "mikro" at 42.136,70.427 h1 r90; Top Overlay "PWM" at 46.595,75.247 h1 r90; Top Overlay "AN" at 46.595,61.105 h1 r90; Top Overlay "+5V" at 61.835,76.116 h1 r90; Top Overlay "GND" at 64.375,75.532 h1 r90; Top Overlay "TX" at 54.215,76.908 h1 r90; Top Overlay "RX" at 51.675,76.819 h1 r90; Top Overlay "INT" at 49.135,76.51 h1 r90; Top Overlay "SCL" at 56.755,75.925 h1 r90; Top Overlay "GND" at 64.375,61.105 h1 r90; Top Overlay "+3.3V" at 61.835,61.105 h1 r90; Top Overlay "MOSI" at 59.295,61.105 h1 r90; Top Overlay "SCK" at 54.215,61.105 h1 r90; Top Overlay "MISO" at 56.755,61.105 h1 r90; Top Overlay "CS" at 51.675,61.105 h1 r90; Top Overlay "RST" at 49.135,61.105 h1 r90; Top Overlay "SDA" at 59.295,75.692 h1 r90; Bottom Overlay "1" at 65.01,70.884 h1 r90; Bottom Overlay "RST" at 49.135,64.089 h1 r90; Bottom Overlay "CS" at 51.675,63.112 h1 r90; Bottom Overlay "MISO" at 56.755,64.944 h1 r90; Bottom Overlay "SCK" at 54.215,64.26 h1 r90; Bottom Overlay "MOSI" at 59.295,64.871 h1 r90; Bottom Overlay "+3.3V" at 61.835,65.169 h1 r90; Bottom Overlay "GND" at 64.375,64.407 h1 r90; Bottom Overlay "AN" at 46.595,63.146 h1 r90; Bottom Overlay "SDA" at 59.295,78.885 h1 r90; Bottom Overlay "SCL" at 56.755,78.885 h1 r90; Bottom Overlay "INT" at 49.135,78.885 h1 r90; Bottom Overlay "RX" at 51.675,78.885 h1 r90; Bottom Overlay "TX" at 54.215,78.885 h1 r90; Bottom Overlay "GND" at 64.375,78.885 h1 r90; Bottom Overlay "+5V" at 61.835,78.885 h1 r90; Bottom Overlay "PWM" at 46.595,78.885 h1 r90; Bottom Overlay "BUS" at 44.436,69.487 h1 r90; Bottom Overlay "mikro" at 41.642,69.487 h1 r90